# EAGLE board Adapter-QFP-64-05 (EAGLE 5.06)
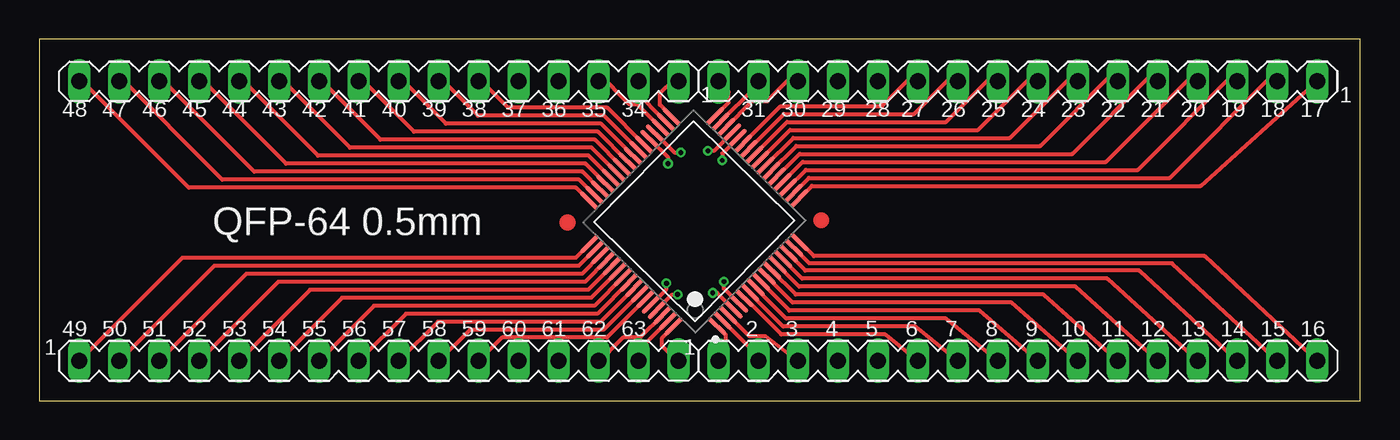
[diagram p0: board, top side]
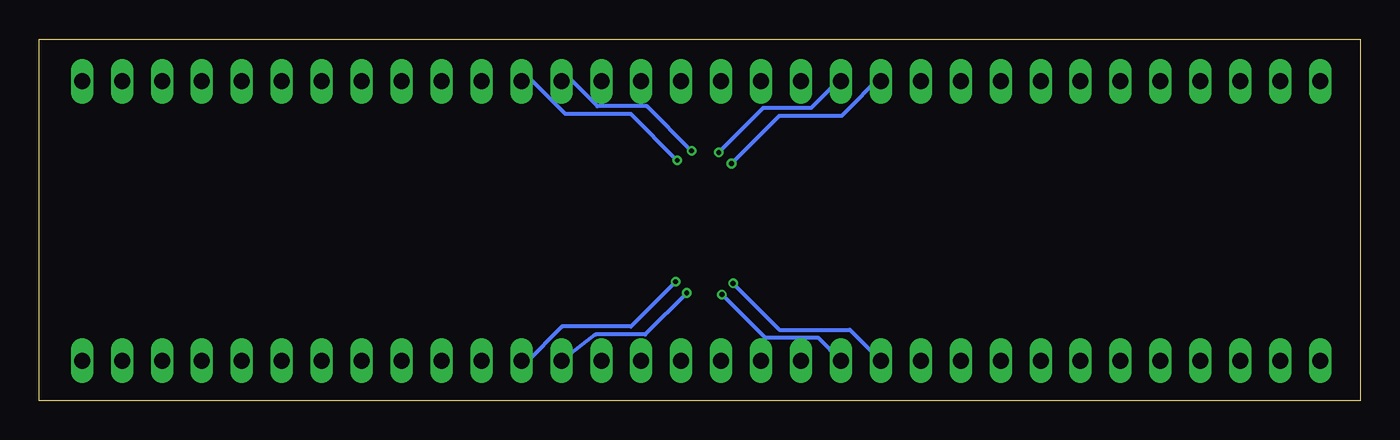
[diagram p1: board, bottom side, seen from below]

Size 84 x 23 mm. Coordinates in mm from the lower left corner, seen from the top.
Outline: 0,0 84,0 84,23 0,23 0,0
Copper layers (1*16): Top 0.035mm / dielectric 1.5mm / Bottom 0.035mm
Design rules "PCB-POOL": minimum track width 6mil, minimum drill 12mil, track to track 6mil, track to pad 6mil, pad to pad 6mil, via to via 6mil, smd to smd 6mil, copper to edge 20mil, drill to drill 8mil, minimum pad ring 8mil, minimum via ring 6mil, stop-mask expansion 3mil, vias tented up to drill 0mil, thermal gap 8mil
Net classes: 0 default: width 0.152 mm

## Footprints (pad centres in the part's own frame; a part is rotated, then mirrored left to right if it is on the bottom)
MA16-1 = drill 1.016 long: 1 -17.78,0; 2 -15.24,0; 3 -12.7,0; 4 -10.16,0; 5 -7.62,0; 6 -5.08,0; 7 -2.54,0; 8 0,0; 9 2.54,0; 10 5.08,0; 11 7.62,0; 12 10.16,0; 13 12.7,0; 14 15.24,0; 15 17.78,0; 16 20.32,0
TSQFP50P1200X1200X160-64N = smd 1.55 x 0.3: 1 -5.7,3.75; 2 -5.7,3.25; 3 -5.7,2.75; 4 -5.7,2.25; 5 -5.7,1.75; 6 -5.7,1.25; 7 -5.7,0.75; 8 -5.7,0.25; 9 -5.7,-0.25; 10 -5.7,-0.75; 11 -5.7,-1.25; 12 -5.7,-1.75; 13 -5.7,-2.25; 14 -5.7,-2.75; 15 -5.7,-3.25; 16 -5.7,-3.75; 33 5.7,-3.75; 34 5.7,-3.25; 35 5.7,-2.75; 36 5.7,-2.25; 37 5.7,-1.75; 38 5.7,-1.25; 39 5.7,-0.75; 40 5.7,-0.25; 41 5.7,0.25; 42 5.7,0.75; 43 5.7,1.25; 44 5.7,1.75; 45 5.7,2.25; 46 5.7,2.75; 47 5.7,3.25; 48 5.7,3.75 | smd 0.3 x 1.55: 17 -3.75,-5.7; 18 -3.25,-5.7; 19 -2.75,-5.7; 20 -2.25,-5.7; 21 -1.75,-5.7; 22 -1.25,-5.7; 23 -0.75,-5.7; 24 -0.25,-5.7; 25 0.25,-5.7; 26 0.75,-5.7; 27 1.25,-5.7; 28 1.75,-5.7; 29 2.25,-5.7; 30 2.75,-5.7; 31 3.25,-5.7; 32 3.75,-5.7; 49 3.75,5.7; 50 3.25,5.7; 51 2.75,5.7; 52 2.25,5.7; 53 1.75,5.7; 54 1.25,5.7; 55 0.75,5.7; 56 0.25,5.7; 57 -0.25,5.7; 58 -0.75,5.7; 59 -1.25,5.7; 60 -1.75,5.7; 61 -2.25,5.7; 62 -2.75,5.7; 63 -3.25,5.7; 64 -3.75,5.7

## Placement (x,y rotation side)
1-16  MA16  [MA16-1]  60.96,2.54 0 top
17-32  MA16  [MA16-1]  63.5,20.32 180 top
33-48  MA16  [MA16-1]  22.86,20.32 180 top
49-64  MA16  [MA16-1]  20.32,2.54 0 top
U$1  QFP-64  [TSQFP50P1200X1200X160-64N]  41.66,11.41 135.5 top

## Library data of the parts
1-16 17-32 33-48 49-64 U$1 = turbod3

## Nets
N$1: 1-16.1 U$1.1
N$2: 1-16.2 U$1.2
N$3: 1-16.3 U$1.3
N$4: 1-16.4 U$1.4
N$5: 1-16.5 U$1.5
N$6: 1-16.6 U$1.6
N$7: 1-16.7 U$1.7
N$8: 1-16.8 U$1.8
N$9: 1-16.9 U$1.9
N$10: 1-16.10 U$1.10
N$11: 1-16.11 U$1.11
N$12: 1-16.12 U$1.12
N$13: 1-16.13 U$1.13
N$14: 1-16.14 U$1.14
N$15: 1-16.15 U$1.15
N$16: 1-16.16 U$1.16
N$17: 17-32.1 U$1.17
N$18: 17-32.2 U$1.18
N$19: 17-32.3 U$1.19
N$20: 17-32.4 U$1.20
N$21: 17-32.5 U$1.21
N$22: 17-32.6 U$1.22
N$23: 17-32.7 U$1.23
N$24: 17-32.8 U$1.24
N$25: 17-32.9 U$1.25
N$26: 17-32.10 U$1.26
N$27: 17-32.11 U$1.27
N$28: 17-32.12 U$1.28
N$29: 17-32.13 U$1.29
N$30: 17-32.14 U$1.30
N$31: 17-32.15 U$1.31
N$32: 17-32.16 U$1.32
N$33: 33-48.1 U$1.33
N$34: 33-48.2 U$1.34
N$35: 33-48.3 U$1.35
N$36: 33-48.4 U$1.36
N$37: 33-48.5 U$1.37
N$38: 33-48.6 U$1.38
N$39: 33-48.7 U$1.39
N$40: 33-48.8 U$1.40
N$41: 33-48.9 U$1.41
N$42: 33-48.10 U$1.42
N$43: 33-48.11 U$1.43
N$44: 33-48.12 U$1.44
N$45: 33-48.13 U$1.45
N$46: 33-48.14 U$1.46
N$47: 33-48.15 U$1.47
N$48: 33-48.16 U$1.48
N$49: 49-64.1 U$1.49
N$50: 49-64.2 U$1.50
N$51: 49-64.3 U$1.51
N$52: 49-64.4 U$1.52
N$53: 49-64.5 U$1.53
N$54: 49-64.6 U$1.54
N$55: 49-64.7 U$1.55
N$56: 49-64.8 U$1.56
N$57: 49-64.9 U$1.57
N$58: 49-64.10 U$1.58
N$59: 49-64.11 U$1.59
N$60: 49-64.12 U$1.60
N$61: 49-64.13 U$1.61
N$62: 49-64.14 U$1.62
N$63: 49-64.15 U$1.63
N$64: 49-64.16 U$1.64

## Tracks (layer width: path | path; a pad name or v marks a point on that pad's centre or on a via)
N$1
  Top 0.254: U$1.1 43.64,4.2 43.64,3.71 42.93,3 1-16.1
N$2
  Top 0.254: U$1.2 45.47,3.08 1-16.2
N$3
  Top 0.254: U$1.3 45.14,4.12 46.18,4.12 1-16.3
N$4  (via drill 0.3)
  Top 0.254: U$1.4 43.1,6.86 v42.82,6.86
  Bottom 0.254: v42.82,6.86 45.47,4.22 48.62,4.22 1-16.4
N$5  (via drill 0.3)
  Top 0.254: U$1.5 43.54,7.13 v43.54,7.57
  Bottom 0.254: v43.54,7.57 46.38,4.72 50.75,4.72 53.09,2.39 1-16.5
N$6
  Top 0.254: U$1.6 44.88,6.53 47.19,4.22 53.8,4.22 1-16.6
N$7
  Top 0.254: U$1.7 45.2,6.82 47.3,4.72 55.73,4.72 1-16.7
N$8
  Top 0.254: U$1.8 45.55,7.18 47.5,5.23 57.66,5.23 1-16.8
N$9
  Top 0.254: U$1.9 45.9,7.54 47.7,5.74 59.79,5.74 1-16.9
N$10
  Top 0.254: U$1.10 46.25,7.91 47.9,6.25 61.82,6.25 1-16.10
N$11
  Top 0.254: U$1.11 46.6,8.27 48.11,6.76 63.86,6.76 1-16.11
N$12
  Top 0.254: U$1.12 46.95,8.63 48.31,7.26 65.89,7.26 1-16.12
N$13
  Top 0.254: U$1.13 47.3,8.99 48.51,7.77 67.92,7.77 1-16.13
N$14
  Top 0.254: U$1.14 47.62,9.38 48.72,8.28 69.95,8.28 1-16.14
N$15
  Top 0.254: U$1.15 47.97,9.74 48.97,8.74 72.03,8.74 1-16.15
N$16
  Top 0.254: U$1.16 49.25,9.2 74.12,9.2 1-16.16
N$17
  Top 0.254: U$1.17 48.33,12.87 49.12,13.66 73.86,13.66 17-32.1
N$18
  Top 0.254: U$1.18 48.94,14.17 71.88,14.17 78.49,20.78 17-32.2
N$19
  Top 0.254: U$1.19 48.74,14.68 69.85,14.68 75.95,20.78 17-32.3
N$20
  Top 0.254: U$1.20 48.54,15.19 67.82,15.19 73.41,20.78 17-32.4
N$21
  Top 0.254: U$1.21 48.34,15.7 65.68,15.7 70.81,20.83 17-32.5
N$22
  Top 0.254: U$1.22 48.15,16.2 63.65,16.2 68.28,20.83 17-32.6
N$23
  Top 0.254: U$1.23 47.95,16.71 61.72,16.71 65.79,20.78 17-32.7
N$24
  Top 0.254: U$1.24 47.75,17.22 59.69,17.22 63.25,20.78 17-32.8
N$25
  Top 0.254: U$1.25 47.55,17.73 57.66,17.73 60.71,20.78 17-32.9
N$26
  Top 0.254: U$1.26 47.35,18.24 55.63,18.24 58.17,20.78 17-32.10
N$27
  Top 0.254: U$1.27 47.15,18.75 53.59,18.75 55.63,20.78 17-32.11
N$28  (via drill 0.3)
  Top 0.254: U$1.28 43.43,15.74 v43.43,15.29
  Bottom 0.254: v43.43,15.29 46.38,18.24 50.55,18.24 53.09,20.78 17-32.12
N$29  (via drill 0.3)
  Top 0.254: U$1.29 42.89,15.9 v42.52,15.9
  Bottom 0.254: v42.52,15.9 45.36,18.75 48.51,18.75 50.55,20.78 17-32.13
N$30
  Top 0.254: U$1.30 45.33,19.05 46.28,19.05 48.01,20.78 17-32.14
N$31
  Top 0.254: U$1.31 45.47,19.89 17-32.15
N$32
  Top 0.254: U$1.32 43.84,18.97 43.84,19.66 17-32.16 42.93,20.57
N$33
  Top 0.254: U$1.33 39.47,18.83 39.47,19.56 40.39,20.47 33-48.1
N$34
  Top 0.254: U$1.34 37.85,19.75 33-48.2
N$35
  Top 0.254: U$1.35 38.04,18.85 37.54,18.85 35.56,20.83 33-48.3
N$36  (via drill 0.3)
  Top 0.254: U$1.36 40.38,15.8 v40.79,15.8
  Bottom 0.254: v40.79,15.8 37.95,18.64 34.9,18.64 32.77,20.78 33-48.4
N$37  (via drill 0.3)
  Top 0.254: U$1.37 39.98,15.49 v39.98,15.09
  Bottom 0.254: 30.23,20.78 33-48.5 30.28,20.83 32.97,18.14 36.93,18.14 v39.98,15.09
N$38
  Top 0.254: U$1.38 36.12,18.64 29.82,18.64 27.69,20.78 33-48.6
N$39
  Top 0.254: U$1.39 35.92,18.14 27.89,18.14 25.2,20.83 33-48.7
N$40
  Top 0.254: U$1.40 35.73,17.63 25.86,17.63 22.66,20.83 33-48.8
N$41
  Top 0.254: U$1.41 35.53,17.12 23.82,17.12 20.12,20.83 33-48.9
N$42
  Top 0.254: U$1.42 35.33,16.61 21.69,16.61 17.53,20.78 33-48.10
N$43
  Top 0.254: U$1.43 35.13,16.1 19.76,16.1 15.04,20.83 33-48.11
N$44
  Top 0.254: U$1.44 34.93,15.6 17.73,15.6 12.5,20.83 33-48.12
N$45
  Top 0.254: U$1.45 34.73,15.09 15.7,15.09 9.96,20.83 33-48.13
N$46
  Top 0.254: U$1.46 34.53,14.58 13.66,14.58 7.42,20.83 33-48.14
N$47
  Top 0.254: U$1.47 34.33,14.07 11.63,14.07 4.88,20.83 33-48.15
N$48
  Top 0.254: U$1.48 34.13,13.56 9.5,13.56 2.29,20.78 33-48.16
N$49
  Top 0.254: U$1.49 34.1,9.09 9.09,9.09 49-64.1
N$50
  Top 0.254: U$1.50 34.3,8.59 11.12,8.59 49-64.2
N$51
  Top 0.254: U$1.51 34.5,8.08 13.16,8.08 49-64.3
N$52
  Top 0.254: U$1.52 34.7,7.57 15.19,7.57 49-64.4
N$53
  Top 0.254: U$1.53 34.9,7.06 17.22,7.06 49-64.5
N$54
  Top 0.254: U$1.54 35.1,6.55 19.25,6.55 49-64.6
N$55
  Top 0.254: U$1.55 35.3,6.04 21.29,6.04 49-64.7
N$56
  Top 0.254: U$1.56 35.5,5.54 23.32,5.54 49-64.8
N$57
  Top 0.254: U$1.57 35.7,5.03 25.35,5.03 49-64.9
N$58
  Top 0.254: U$1.58 35.89,4.52 27.38,4.52 49-64.10
N$59
  Top 0.254: U$1.59 36.09,4.01 29.41,4.01 49-64.11
N$60  (via drill 0.3)
  Top 0.254: U$1.60 39.88,7.09 v39.88,7.47
  Bottom 0.254: v39.88,7.47 36.93,4.52 32.46,4.52 49-64.12
N$61  (via drill 0.3)
  Top 0.254: U$1.61 40.25,6.76 v40.59,6.76
  Bottom 0.254: v40.59,6.76 37.85,4.01 34.49,4.01 49-64.13
N$62
  Top 0.254: U$1.62 38.22,4.01 37.13,4.01 35.41,2.29 49-64.14
N$63
  Top 0.254: U$1.63 37.85,2.94 49-64.15
N$64
  Top 0.254: U$1.64 39.57,3.96 39.57,3.5 40.39,2.69 49-64.16

## Text on the board
tNames: 48 | 47 | 46 | 45 | 44 | 43 | 42 | 41 | 40 | 39 | 38 | 37 | 36 | 35 | 34 | 31 | 30 | 29 | 28 | 27 | 26 | 25 | 24 | 23 | 22 | 21 | 20 | 19 | 18 | 17 | QFP-64 0.5mm | 49 | 50 | 51 | 52 | 53 | 54 | 55 | 56 | 57 | 58 | 59 | 60 | 61 | 62 | 63 | 2 | 3 | 4 | 5 | 6 | 7 | 8 | 9 | 10 | 11 | 12 | 13 | 14 | 15 | 16